# Altium PCB TFR_Soccer_2015.PcbDoc (part 1 of 2)
Units mm, origin at the board's own origin, x right, y up, seen from the top; angles counter-clockwise.
Board outline 210.01 x 194.46 mm, 2 copper layers (Top Layer, Bottom Layer); 53 components, 91 nets, 338 pads, 161 vias.
Unrouted connection lines stored in the file: 2.
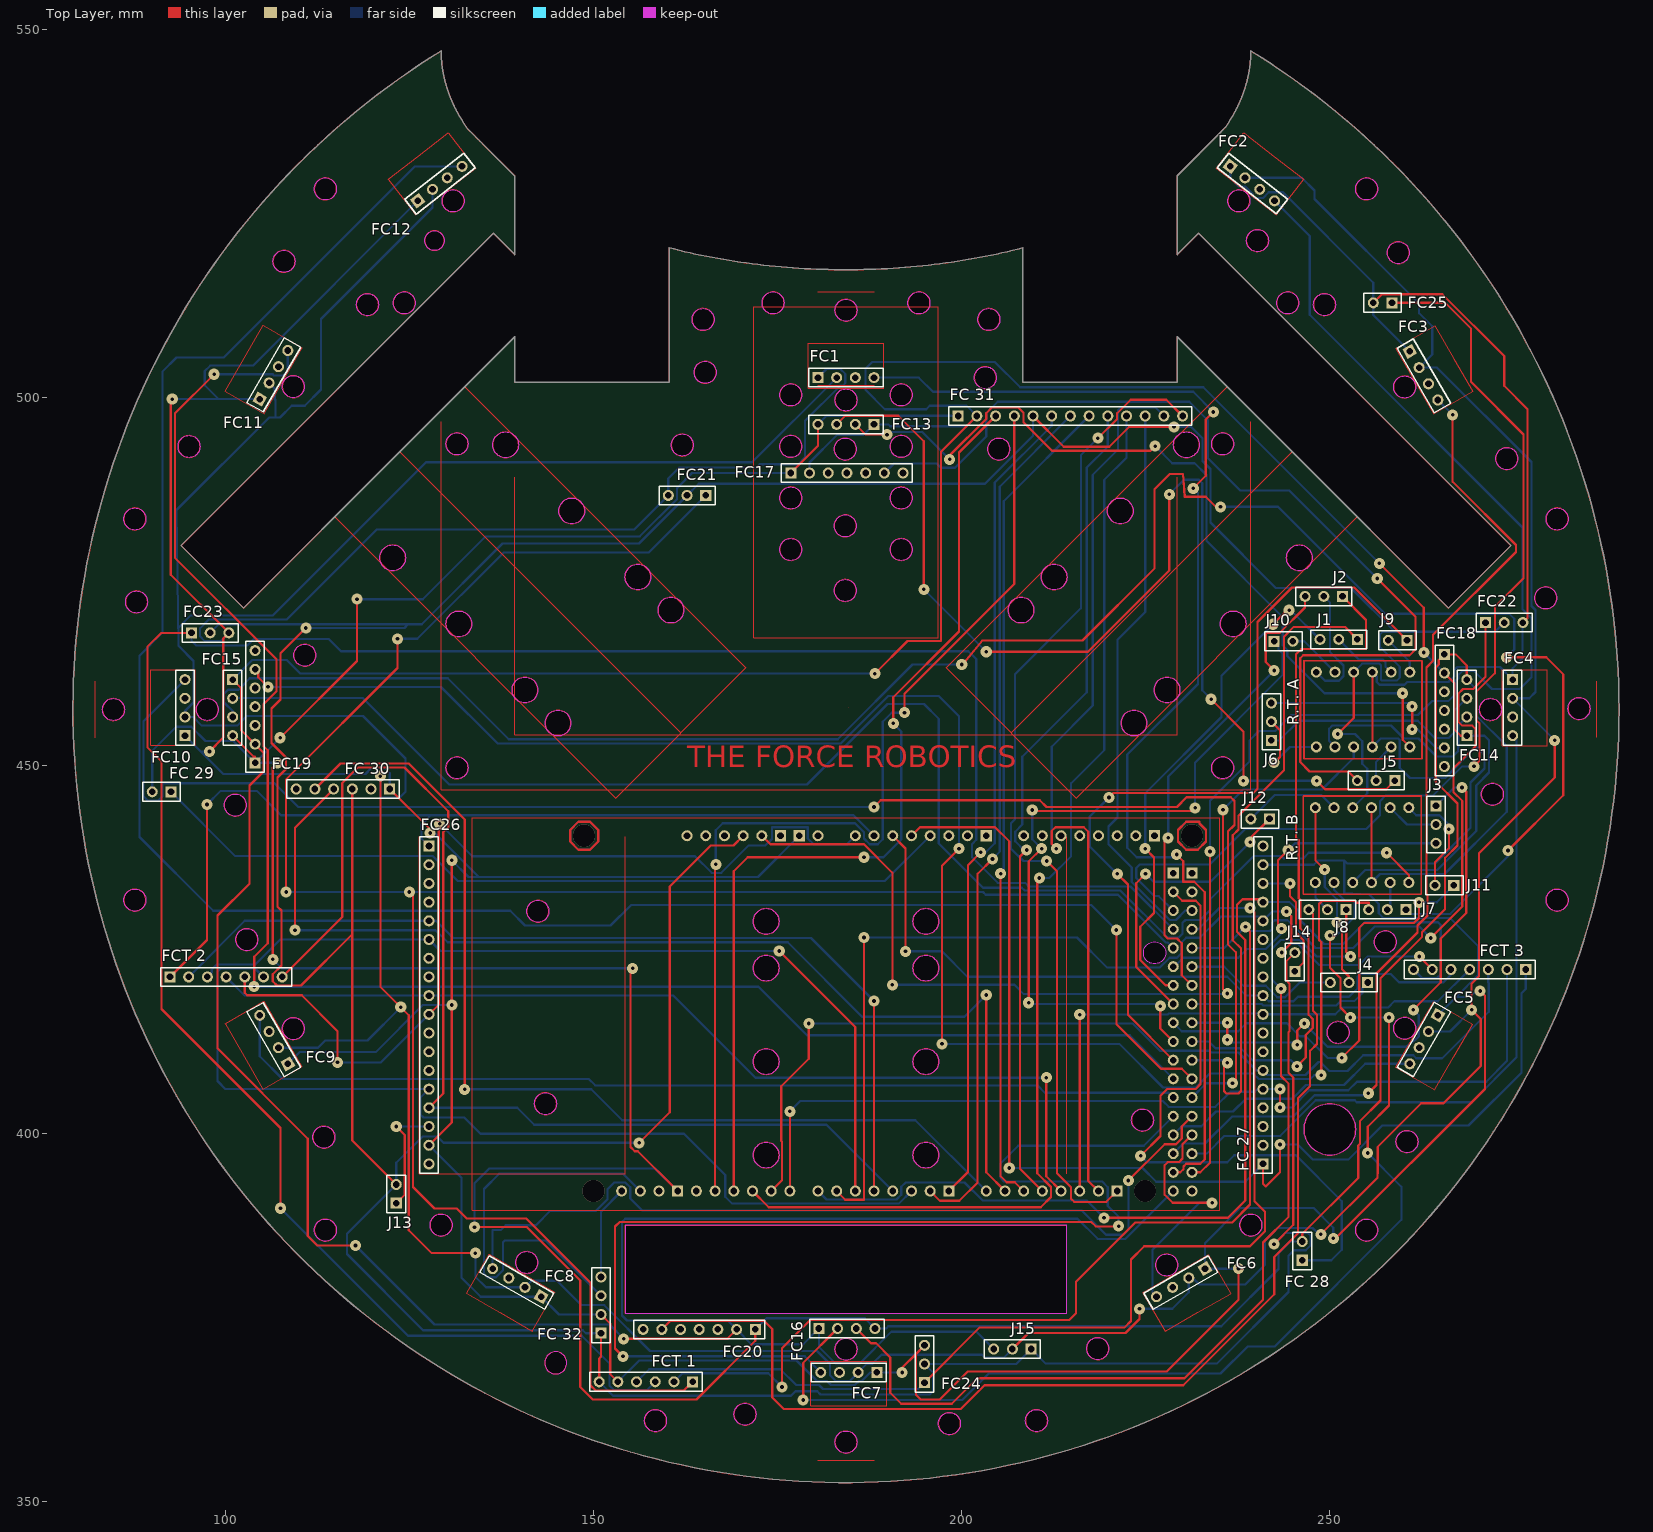
[diagram p0: Top Layer view]
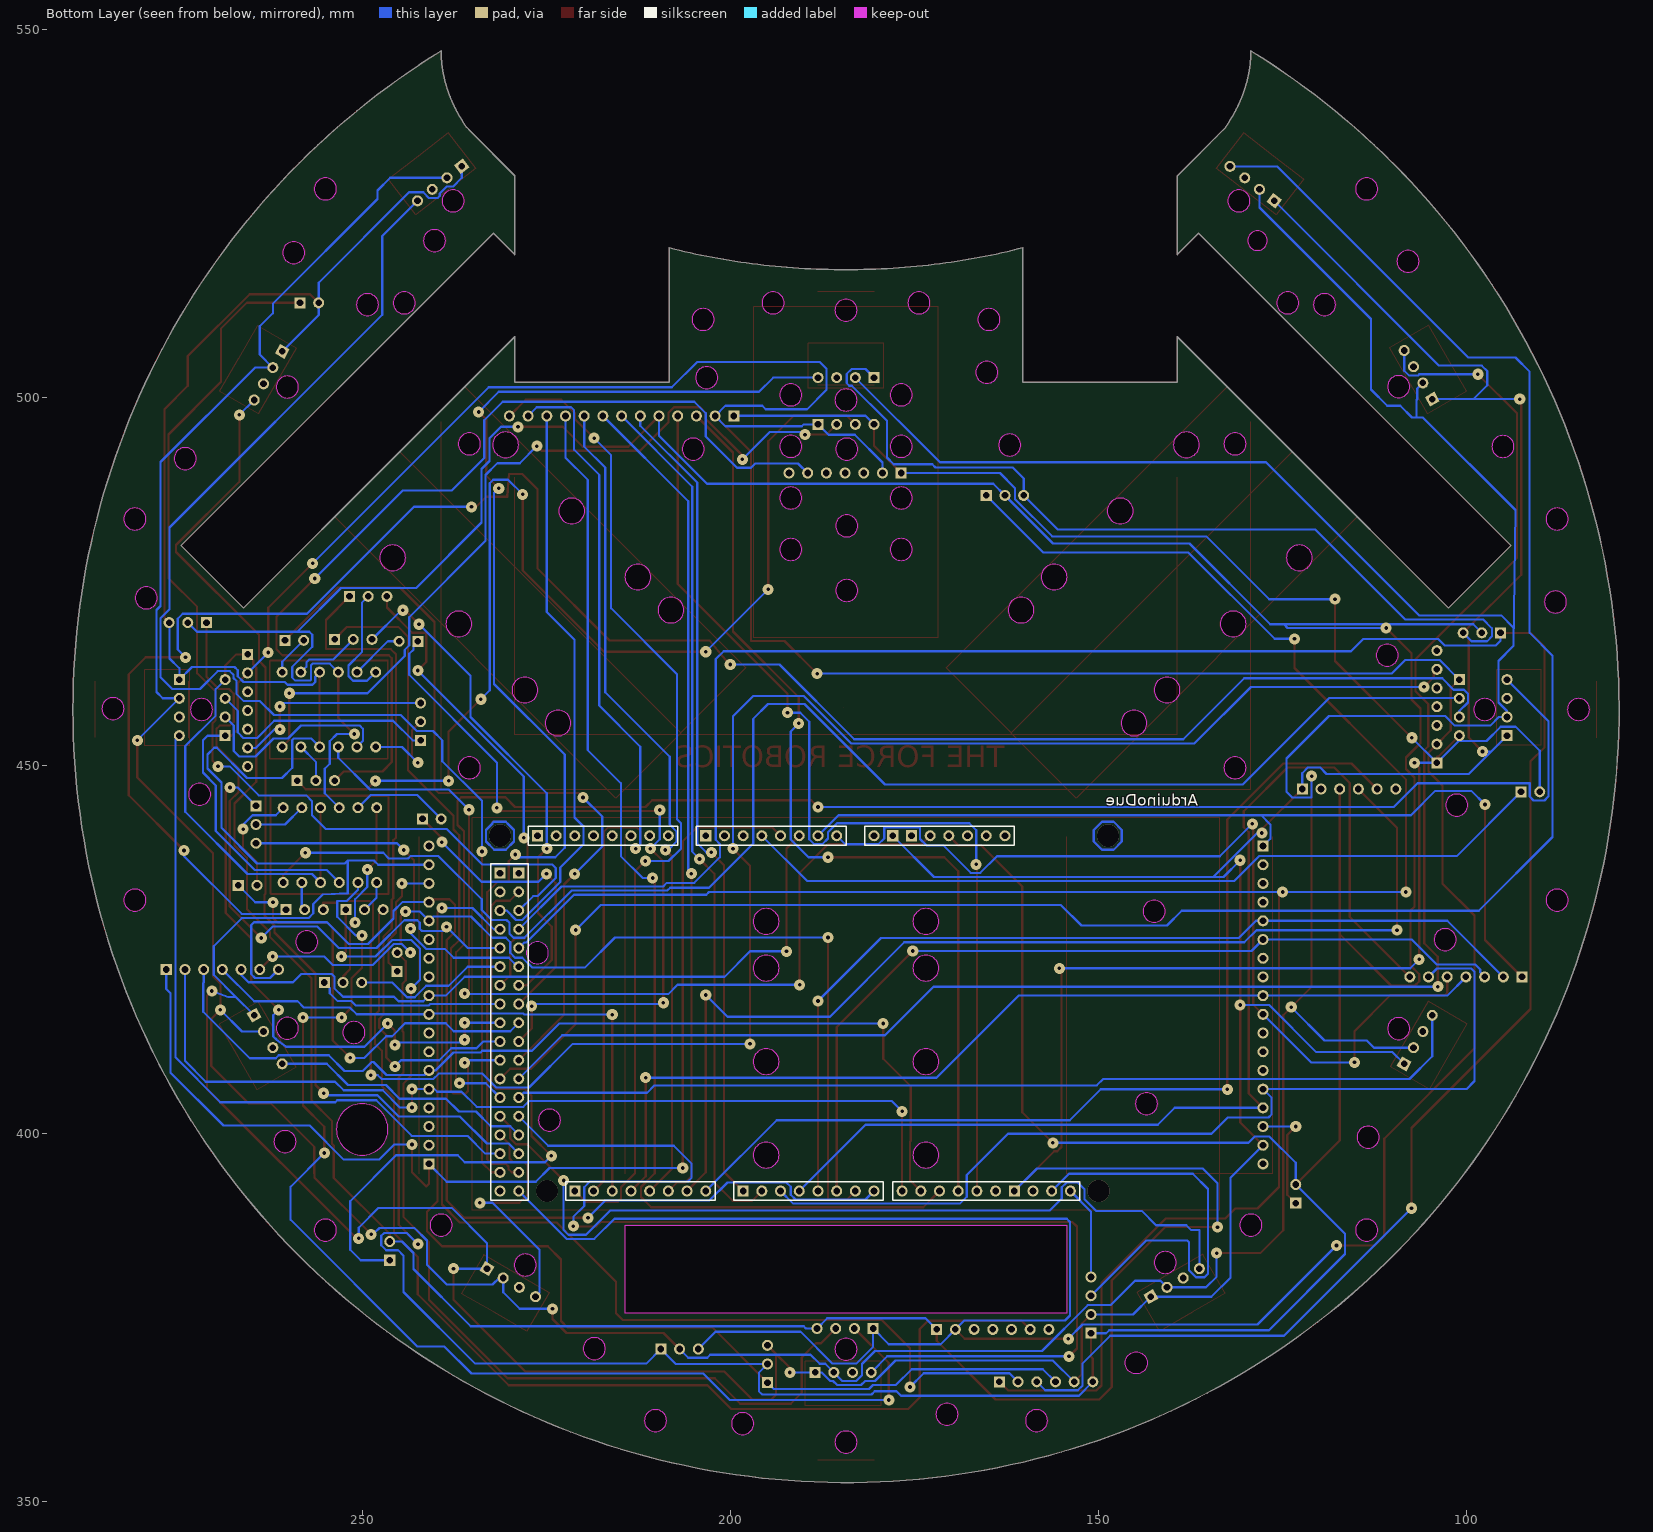
[diagram p1: Bottom Layer view, seen from below]

## Layer stack, top to bottom
Top Solder: solder mask 0.0102, Solder Resist, Dk 3.5
Top Layer: signal copper 0.0356
Dielectric 1: dielectric 0.32, FR-4, Dk 4.8
Bottom Layer: signal copper 0.0356
Bottom Solder: solder mask 0.0102, Solder Resist, Dk 3.5

## Board outline
931 vertices, not listed, extent 79.271,352.577 289.284,547.038
cut-out: 154.277,375.556 214.277,375.556 214.277,387.556 154.277,387.556
cut-out: 283.845,456.208 cw(c283.845,457.708) 282.345,457.708 cw(c283.845,457.708) 283.845,459.208 cw(c283.845,457.708) 285.345,457.708 cw(c283.845,457.708)
cut-out: 143.459,402.54 cw(c143.459,404.04) 141.959,404.04 cw(c143.459,404.04) 143.459,405.54 cw(c143.459,404.04) 144.959,404.04 cw(c143.459,404.04)
cut-out: 142.419,428.68 cw(c142.419,430.18) 140.919,430.18 cw(c142.419,430.18) 142.419,431.68 cw(c142.419,430.18) 143.919,430.18 cw(c142.419,430.18)
cut-out: 131.434,448.164 cw(c131.434,449.664) 129.934,449.664 cw(c131.434,449.664) 131.434,451.164 cw(c131.434,449.664) 132.934,449.664 cw(c131.434,449.664)
cut-out: 145.151,453.991 cw(c145.151,455.741) 143.401,455.741 cw(c145.151,455.741) 145.151,457.491 cw(c145.151,455.741) 146.901,455.741 cw(c145.151,455.741)
cut-out: 140.661,458.481 cw(c140.661,460.231) 138.911,460.231 cw(c140.661,460.231) 140.661,461.981 cw(c140.661,460.231) 142.411,460.231 cw(c140.661,460.231)
cut-out: 122.701,476.441 cw(c122.701,478.191) 120.951,478.191 cw(c122.701,478.191) 122.701,479.941 cw(c122.701,478.191) 124.451,478.191 cw(c122.701,478.191)
cut-out: 131.681,467.461 cw(c131.681,469.211) 129.931,469.211 cw(c131.681,469.211) 131.681,470.961 cw(c131.681,469.211) 133.431,469.211 cw(c131.681,469.211)
cut-out: 147.025,482.805 cw(c147.025,484.555) 145.275,484.555 cw(c147.025,484.555) 147.025,486.305 cw(c147.025,484.555) 148.775,484.555 cw(c147.025,484.555)
cut-out: 156.005,473.825 cw(c156.005,475.575) 154.255,475.575 cw(c156.005,475.575) 156.005,477.325 cw(c156.005,475.575) 157.755,475.575 cw(c156.005,475.575)
cut-out: 156.005,473.825 cw(c156.005,475.575) 154.255,475.575 cw(c156.005,475.575) 156.005,477.325 cw(c156.005,475.575) 157.755,475.575 cw(c156.005,475.575)
cut-out: 160.495,469.335 cw(c160.495,471.085) 158.745,471.085 cw(c160.495,471.085) 160.495,472.835 cw(c160.495,471.085) 162.245,471.085 cw(c160.495,471.085)
cut-out: 131.434,492.164 cw(c131.434,493.664) 129.934,493.664 cw(c131.434,493.664) 131.434,495.164 cw(c131.434,493.664) 132.934,493.664 cw(c131.434,493.664)
cut-out: 138.045,491.786 cw(c138.045,493.536) 136.295,493.536 cw(c138.045,493.536) 138.045,495.286 cw(c138.045,493.536) 139.795,493.536 cw(c138.045,493.536)
cut-out: 162.043,492.008 cw(c162.043,493.508) 160.543,493.508 cw(c162.043,493.508) 162.043,495.008 cw(c162.043,493.508) 163.543,493.508 cw(c162.043,493.508)
cut-out: 165.152,501.886 cw(c165.152,503.386) 163.652,503.386 cw(c165.152,503.386) 165.152,504.886 cw(c165.152,503.386) 166.652,503.386 cw(c165.152,503.386)
cut-out: 164.868,509.065 cw(c164.868,510.565) 163.368,510.565 cw(c164.868,510.565) 164.868,512.065 cw(c164.868,510.565) 166.368,510.565 cw(c164.868,510.565)
cut-out: 194.186,511.318 cw(c194.186,512.818) 192.686,512.818 cw(c194.186,512.818) 194.186,514.318 cw(c194.186,512.818) 195.686,512.818 cw(c194.186,512.818)
cut-out: 184.277,510.318 cw(c184.277,511.818) 182.777,511.818 cw(c184.277,511.818) 184.277,513.318 cw(c184.277,511.818) 185.777,511.818 cw(c184.277,511.818)
cut-out: 174.368,511.318 cw(c174.368,512.818) 172.868,512.818 cw(c174.368,512.818) 174.368,514.318 cw(c174.368,512.818) 175.868,512.818 cw(c174.368,512.818)
cut-out: 176.777,498.818 cw(c176.777,500.318) 175.277,500.318 cw(c176.777,500.318) 176.777,501.818 cw(c176.777,500.318) 178.277,500.318 cw(c176.777,500.318)
cut-out: 184.277,498.118 cw(c184.277,499.618) 182.777,499.618 cw(c184.277,499.618) 184.277,501.118 cw(c184.277,499.618) 185.777,499.618 cw(c184.277,499.618)
cut-out: 184.177,491.459 cw(c184.177,492.959) 182.677,492.959 cw(c184.177,492.959) 184.177,494.459 cw(c184.177,492.959) 185.677,492.959 cw(c184.177,492.959)
cut-out: 176.777,491.818 cw(c176.777,493.318) 175.277,493.318 cw(c176.777,493.318) 176.777,494.818 cw(c176.777,493.318) 178.277,493.318 cw(c176.777,493.318)
cut-out: 176.777,484.818 cw(c176.777,486.318) 175.277,486.318 cw(c176.777,486.318) 176.777,487.818 cw(c176.777,486.318) 178.277,486.318 cw(c176.777,486.318)
cut-out: 184.177,481.032 cw(c184.177,482.532) 182.677,482.532 cw(c184.177,482.532) 184.177,484.032 cw(c184.177,482.532) 185.677,482.532 cw(c184.177,482.532)
cut-out: 176.777,477.818 cw(c176.777,479.318) 175.277,479.318 cw(c176.777,479.318) 176.777,480.818 cw(c176.777,479.318) 178.277,479.318 cw(c176.777,479.318)
cut-out: 184.177,472.251 cw(c184.177,473.751) 182.677,473.751 cw(c184.177,473.751) 184.177,475.251 cw(c184.177,473.751) 185.677,473.751 cw(c184.177,473.751)
cut-out: 191.777,477.818 cw(c191.777,479.318) 190.277,479.318 cw(c191.777,479.318) 191.777,480.818 cw(c191.777,479.318) 193.277,479.318 cw(c191.777,479.318)
cut-out: 191.777,484.818 cw(c191.777,486.318) 190.277,486.318 cw(c191.777,486.318) 191.777,487.818 cw(c191.777,486.318) 193.277,486.318 cw(c191.777,486.318)
cut-out: 191.777,491.818 cw(c191.777,493.318) 190.277,493.318 cw(c191.777,493.318) 191.777,494.818 cw(c191.777,493.318) 193.277,493.318 cw(c191.777,493.318)
cut-out: 191.777,498.818 cw(c191.777,500.318) 190.277,500.318 cw(c191.777,500.318) 191.777,501.818 cw(c191.777,500.318) 193.277,500.318 cw(c191.777,500.318)
cut-out: 203.686,509.065 cw(c203.686,510.565) 202.186,510.565 cw(c203.686,510.565) 203.686,512.065 cw(c203.686,510.565) 205.186,510.565 cw(c203.686,510.565)
cut-out: 203.202,501.154 cw(c203.202,502.654) 201.702,502.654 cw(c203.202,502.654) 203.202,504.154 cw(c203.202,502.654) 204.702,502.654 cw(c203.202,502.654)
cut-out: 205.031,491.459 cw(c205.031,492.959) 203.531,492.959 cw(c205.031,492.959) 205.031,494.459 cw(c205.031,492.959) 206.531,492.959 cw(c205.031,492.959)
cut-out: 237.642,525.171 cw(c237.642,526.671) 236.142,526.671 cw(c237.642,526.671) 237.642,528.171 cw(c237.642,526.671) 239.142,526.671 cw(c237.642,526.671)
cut-out: 240.171,519.78 cw(c240.171,521.28) 238.671,521.28 cw(c240.171,521.28) 240.171,522.78 cw(c240.171,521.28) 241.671,521.28 cw(c240.171,521.28)
cut-out: 254.988,526.792 cw(c254.988,528.292) 253.488,528.292 cw(c254.988,528.292) 254.988,529.792 cw(c254.988,528.292) 256.488,528.292 cw(c254.988,528.292)
cut-out: 259.292,518.13 cw(c259.292,519.63) 257.792,519.63 cw(c259.292,519.63) 259.292,521.13 cw(c259.292,519.63) 260.792,519.63 cw(c259.292,519.63)
cut-out: 249.277,511.081 cw(c249.277,512.581) 247.777,512.581 cw(c249.277,512.581) 249.277,514.081 cw(c249.277,512.581) 250.777,512.581 cw(c249.277,512.581)
cut-out: 244.277,511.318 cw(c244.277,512.818) 242.777,512.818 cw(c244.277,512.818) 244.277,514.318 cw(c244.277,512.818) 245.777,512.818 cw(c244.277,512.818)
cut-out: 260.16,499.892 cw(c260.16,501.392) 258.66,501.392 cw(c260.16,501.392) 260.16,502.892 cw(c260.16,501.392) 261.66,501.392 cw(c260.16,501.392)
cut-out: 274.033,490.161 cw(c274.033,491.661) 272.533,491.661 cw(c274.033,491.661) 274.033,493.161 cw(c274.033,491.661) 275.533,491.661 cw(c274.033,491.661)
cut-out: 280.87,481.963 cw(c280.87,483.463) 279.37,483.463 cw(c280.87,483.463) 280.87,484.963 cw(c280.87,483.463) 282.37,483.463 cw(c280.87,483.463)
cut-out: 271.822,456.081 cw(c271.822,457.581) 270.322,457.581 cw(c271.822,457.581) 271.822,459.081 cw(c271.822,457.581) 273.322,457.581 cw(c271.822,457.581)
cut-out: 279.32,471.245 cw(c279.32,472.745) 277.82,472.745 cw(c279.32,472.745) 279.32,474.245 cw(c279.32,472.745) 280.82,472.745 cw(c279.32,472.745)
cut-out: 236.873,467.461 cw(c236.873,469.211) 235.123,469.211 cw(c236.873,469.211) 236.873,470.961 cw(c236.873,469.211) 238.623,469.211 cw(c236.873,469.211)
cut-out: 245.853,476.441 cw(c245.853,478.191) 244.103,478.191 cw(c245.853,478.191) 245.853,479.941 cw(c245.853,478.191) 247.603,478.191 cw(c245.853,478.191)
cut-out: 235.434,492.164 cw(c235.434,493.664) 233.934,493.664 cw(c235.434,493.664) 235.434,495.164 cw(c235.434,493.664) 236.934,493.664 cw(c235.434,493.664)
cut-out: 230.509,491.786 cw(c230.509,493.536) 228.759,493.536 cw(c230.509,493.536) 230.509,495.286 cw(c230.509,493.536) 232.259,493.536 cw(c230.509,493.536)
cut-out: 221.529,482.805 cw(c221.529,484.555) 219.779,484.555 cw(c221.529,484.555) 221.529,486.305 cw(c221.529,484.555) 223.279,484.555 cw(c221.529,484.555)
cut-out: 212.549,473.825 cw(c212.549,475.575) 210.799,475.575 cw(c212.549,475.575) 212.549,477.325 cw(c212.549,475.575) 214.299,475.575 cw(c212.549,475.575)
cut-out: 208.059,469.335 cw(c208.059,471.085) 206.309,471.085 cw(c208.059,471.085) 208.059,472.835 cw(c208.059,471.085) 209.809,471.085 cw(c208.059,471.085)
cut-out: 223.403,453.991 cw(c223.403,455.741) 221.653,455.741 cw(c223.403,455.741) 223.403,457.491 cw(c223.403,455.741) 225.153,455.741 cw(c223.403,455.741)
cut-out: 227.893,458.481 cw(c227.893,460.231) 226.143,460.231 cw(c227.893,460.231) 227.893,461.981 cw(c227.893,460.231) 229.643,460.231 cw(c227.893,460.231)
cut-out: 235.434,448.164 cw(c235.434,449.664) 233.934,449.664 cw(c235.434,449.664) 235.434,451.164 cw(c235.434,449.664) 236.934,449.664 cw(c235.434,449.664)
cut-out: 272.083,444.573 cw(c272.083,446.073) 270.583,446.073 cw(c272.083,446.073) 272.083,447.573 cw(c272.083,446.073) 273.583,446.073 cw(c272.083,446.073)
cut-out: 280.87,430.199 cw(c280.87,431.699) 279.37,431.699 cw(c280.87,431.699) 280.87,433.199 cw(c280.87,431.699) 282.37,431.699 cw(c280.87,431.699)
cut-out: 257.528,424.522 cw(c257.528,426.022) 256.028,426.022 cw(c257.528,426.022) 257.528,427.522 cw(c257.528,426.022) 259.028,426.022 cw(c257.528,426.022)
cut-out: 173.427,427.056 cw(c173.427,428.806) 171.677,428.806 cw(c173.427,428.806) 173.427,430.556 cw(c173.427,428.806) 175.177,428.806 cw(c173.427,428.806)
cut-out: 173.427,420.706 cw(c173.427,422.456) 171.677,422.456 cw(c173.427,422.456) 173.427,424.206 cw(c173.427,422.456) 175.177,422.456 cw(c173.427,422.456)
cut-out: 173.427,408.006 cw(c173.427,409.756) 171.677,409.756 cw(c173.427,409.756) 173.427,411.506 cw(c173.427,409.756) 175.177,409.756 cw(c173.427,409.756)
cut-out: 173.427,395.306 cw(c173.427,397.056) 171.677,397.056 cw(c173.427,397.056) 173.427,398.806 cw(c173.427,397.056) 175.177,397.056 cw(c173.427,397.056)
cut-out: 195.127,395.306 cw(c195.127,397.056) 193.377,397.056 cw(c195.127,397.056) 195.127,398.806 cw(c195.127,397.056) 196.877,397.056 cw(c195.127,397.056)
cut-out: 195.127,408.006 cw(c195.127,409.756) 193.377,409.756 cw(c195.127,409.756) 195.127,411.506 cw(c195.127,409.756) 196.877,409.756 cw(c195.127,409.756)
cut-out: 195.127,420.706 cw(c195.127,422.456) 193.377,422.456 cw(c195.127,422.456) 195.127,424.206 cw(c195.127,422.456) 196.877,422.456 cw(c195.127,422.456)
cut-out: 195.127,427.056 cw(c195.127,428.806) 193.377,428.806 cw(c195.127,428.806) 195.127,430.556 cw(c195.127,428.806) 196.877,428.806 cw(c195.127,428.806)
cut-out: 226.189,423.036 cw(c226.189,424.536) 224.689,424.536 cw(c226.189,424.536) 226.189,426.036 cw(c226.189,424.536) 227.689,424.536 cw(c226.189,424.536)
cut-out: 224.555,400.312 cw(c224.555,401.812) 223.055,401.812 cw(c224.555,401.812) 224.555,403.312 cw(c224.555,401.812) 226.055,401.812 cw(c224.555,401.812)
cut-out: 260.159,412.786 cw(c260.159,414.286) 258.659,414.286 cw(c260.159,414.286) 260.159,415.786 cw(c260.159,414.286) 261.659,414.286 cw(c260.159,414.286)
cut-out: 251.118,412.216 cw(c251.118,413.716) 249.618,413.716 cw(c251.118,413.716) 251.118,415.216 cw(c251.118,413.716) 252.618,413.716 cw(c251.118,413.716)
cut-out: 249.996,397.056 cw(c249.996,400.556) 246.496,400.556 cw(c249.996,400.556) 249.996,404.056 cw(c249.996,400.556) 253.496,400.556 cw(c249.996,400.556)
cut-out: 260.48,397.393 cw(c260.48,398.893) 258.98,398.893 cw(c260.48,398.893) 260.48,400.393 cw(c260.48,398.893) 261.98,398.893 cw(c260.48,398.893)
cut-out: 254.988,385.37 cw(c254.988,386.87) 253.488,386.87 cw(c254.988,386.87) 254.988,388.37 cw(c254.988,386.87) 256.488,386.87 cw(c254.988,386.87)
cut-out: 239.277,386.056 cw(c239.277,387.556) 237.777,387.556 cw(c239.277,387.556) 239.277,389.056 cw(c239.277,387.556) 240.777,387.556 cw(c239.277,387.556)
cut-out: 227.84,380.628 cw(c227.84,382.128) 226.34,382.128 cw(c227.84,382.128) 227.84,383.628 cw(c227.84,382.128) 229.34,382.128 cw(c227.84,382.128)
cut-out: 218.465,369.27 cw(c218.465,370.77) 216.965,370.77 cw(c218.465,370.77) 218.465,372.27 cw(c218.465,370.77) 219.965,370.77 cw(c218.465,370.77)
cut-out: 210.159,359.488 cw(c210.159,360.988) 208.659,360.988 cw(c210.159,360.988) 210.159,362.488 cw(c210.159,360.988) 211.659,360.988 cw(c210.159,360.988)
cut-out: 198.326,359.089 cw(c198.326,360.589) 196.826,360.589 cw(c198.326,360.589) 198.326,362.089 cw(c198.326,360.589) 199.826,360.589 cw(c198.326,360.589)
cut-out: 184.277,356.581 cw(c184.277,358.081) 182.777,358.081 cw(c184.277,358.081) 184.277,359.581 cw(c184.277,358.081) 185.777,358.081 cw(c184.277,358.081)
cut-out: 184.277,369.187 cw(c184.277,370.687) 182.777,370.687 cw(c184.277,370.687) 184.277,372.187 cw(c184.277,370.687) 185.777,370.687 cw(c184.277,370.687)
cut-out: 170.558,360.358 cw(c170.558,361.858) 169.058,361.858 cw(c170.558,361.858) 170.558,363.358 cw(c170.558,361.858) 172.058,361.858 cw(c170.558,361.858)
cut-out: 158.395,359.488 cw(c158.395,360.988) 156.895,360.988 cw(c158.395,360.988) 158.395,362.488 cw(c158.395,360.988) 159.895,360.988 cw(c158.395,360.988)
cut-out: 144.853,367.34 ccw(c144.853,368.84) 146.353,368.84 ccw(c144.853,368.84) 144.853,370.34 ccw(c144.853,368.84) 143.353,368.84 ccw(c144.853,368.84)
cut-out: 144.853,367.34 ccw(c144.853,368.84) 146.353,368.84 ccw(c144.853,368.84) 144.853,370.34 ccw(c144.853,368.84) 143.353,368.84 ccw(c144.853,368.84)
cut-out: 140.911,380.969 cw(c140.911,382.469) 139.411,382.469 cw(c140.911,382.469) 140.911,383.969 cw(c140.911,382.469) 142.411,382.469 cw(c140.911,382.469)
cut-out: 129.277,386.056 cw(c129.277,387.556) 127.777,387.556 cw(c129.277,387.556) 129.277,389.056 cw(c129.277,387.556) 130.777,387.556 cw(c129.277,387.556)
cut-out: 113.566,385.37 cw(c113.566,386.87) 112.066,386.87 cw(c113.566,386.87) 113.566,388.37 cw(c113.566,386.87) 115.066,386.87 cw(c113.566,386.87)
cut-out: 113.351,397.991 cw(c113.351,399.491) 111.851,399.491 cw(c113.351,399.491) 113.351,400.991 cw(c113.351,399.491) 114.851,399.491 cw(c113.351,399.491)
cut-out: 109.207,412.74 cw(c109.207,414.24) 107.707,414.24 cw(c109.207,414.24) 109.207,415.74 cw(c109.207,414.24) 110.707,414.24 cw(c109.207,414.24)
cut-out: 102.891,424.827 cw(c102.891,426.327) 101.391,426.327 cw(c102.891,426.327) 102.891,427.827 cw(c102.891,426.327) 104.391,426.327 cw(c102.891,426.327)
cut-out: 87.684,430.199 cw(c87.684,431.699) 86.184,431.699 cw(c87.684,431.699) 87.684,433.199 cw(c87.684,431.699) 89.184,431.699 cw(c87.684,431.699)
cut-out: 101.322,443.097 cw(c101.322,444.597) 99.822,444.597 cw(c101.322,444.597) 101.322,446.097 cw(c101.322,444.597) 102.822,444.597 cw(c101.322,444.597)
cut-out: 97.518,456.081 cw(c97.518,457.581) 96.018,457.581 cw(c97.518,457.581) 97.518,459.081 cw(c97.518,457.581) 99.018,457.581 cw(c97.518,457.581)
cut-out: 84.777,456.081 cw(c84.777,457.581) 83.277,457.581 cw(c84.777,457.581) 84.777,459.081 cw(c84.777,457.581) 86.277,457.581 cw(c84.777,457.581)
cut-out: 110.764,463.456 cw(c110.764,464.956) 109.264,464.956 cw(c110.764,464.956) 110.764,466.456 cw(c110.764,464.956) 112.264,464.956 cw(c110.764,464.956)
cut-out: 87.912,470.69 cw(c87.912,472.19) 86.412,472.19 cw(c87.912,472.19) 87.912,473.69 cw(c87.912,472.19) 89.412,472.19 cw(c87.912,472.19)
cut-out: 87.684,481.963 cw(c87.684,483.463) 86.184,483.463 cw(c87.684,483.463) 87.684,484.963 cw(c87.684,483.463) 89.184,483.463 cw(c87.684,483.463)
cut-out: 95.043,491.807 cw(c95.043,493.307) 93.543,493.307 cw(c95.043,493.307) 95.043,494.807 cw(c95.043,493.307) 96.543,493.307 cw(c95.043,493.307)
cut-out: 109.207,499.938 cw(c109.207,501.438) 107.707,501.438 cw(c109.207,501.438) 109.207,502.938 cw(c109.207,501.438) 110.707,501.438 cw(c109.207,501.438)
cut-out: 128.383,519.941 cw(c128.383,521.28) 127.045,521.28 cw(c128.383,521.28) 128.383,522.618 cw(c128.383,521.28) 129.721,521.28 cw(c128.383,521.28)
cut-out: 130.912,525.171 cw(c130.912,526.671) 129.412,526.671 cw(c130.912,526.671) 130.912,528.171 cw(c130.912,526.671) 132.412,526.671 cw(c130.912,526.671)
cut-out: 124.277,511.318 cw(c124.277,512.818) 122.777,512.818 cw(c124.277,512.818) 124.277,514.318 cw(c124.277,512.818) 125.777,512.818 cw(c124.277,512.818)
cut-out: 119.277,511.081 cw(c119.277,512.581) 117.777,512.581 cw(c119.277,512.581) 119.277,514.081 cw(c119.277,512.581) 120.777,512.581 cw(c119.277,512.581)
cut-out: 107.935,516.961 cw(c107.935,518.461) 106.435,518.461 cw(c107.935,518.461) 107.935,519.961 cw(c107.935,518.461) 109.435,518.461 cw(c107.935,518.461)
cut-out: 113.566,526.792 cw(c113.566,528.292) 112.066,528.292 cw(c113.566,528.292) 113.566,529.792 cw(c113.566,528.292) 115.066,528.292 cw(c113.566,528.292)

## Design rules (kind name [scope] priority, off if disabled: settings)
Clearance Clearance_1 [All] p1: gap=0.254
Clearance [All] p2: gap=0.3
PolygonConnect [All] p1: connectstyle=Relief reliefconductorwidth=0.254 reliefentries=4 polygonreliefangle="90 Angle" airgapwidth=0.254
RoutingVias [All] p1: holewidth=0.5 width=1.5 viastyle="Through Hole" minholewidth=0.711 minwidth=1.27 maxholewidth=0.711 maxwidth=1.27
SolderMaskExpansion [All] p1: expansion=0.102
Width [All] p1: maxlimit=0.3 minlimit=0.3 preferedwidth=0.3
29 further rules are at their usual default settings.

## Components (designator, comment, footprint, x,y, rotation, side; value= is the part's Value field where it differs from the comment)
ArduinoDue "Component_1" Arduino 180.467,418.846 r0 bottom
FC1 "Flat Cable 1" HDR1X4 180.467,502.666 r0 top
FC2 "Flat Cable 2" HDR1X4 236.474,531.368 r322 top
FC3 "Flat Cable 3" HDR1X4 260.858,506.222 r300 top
FC4 "Flat Cable 4" HDR1X4 274.828,461.645 r270 top
FC5 "Flat Cable 5" HDR1X4 264.668,416.052 r240 top
FC6 "Flat Cable 6" HDR1X4 233.045,381.635 r210 top
FC7 "Flat Cable 7" HDR1X4 188.468,367.538 r180 top
FC8 "Flat Cable 8" HDR1X4 142.875,377.825 r150 top
FC9 "Flat Cable 9" HDR1X4 108.458,409.448 r120 top
FC10 "Flat Cable 10" HDR1X4 94.488,454.025 r90 top
FC11 "Flat Cable 11" HDR1X4 104.648,499.745 r60 top
FC12 "Flat Cable 12" HDR1X4 126.111,526.669 r38 top
FC13 "Flat Cable 13" HDR1X4 188.087,496.316 r180 top
FC14 "Flat Cable 14" HDR1X4 268.605,454.025 r90 top
FC15 "Flat Cable 15" HDR1X4 100.965,461.645 r270 top
FC16 "Flat Cable 16" HDR1X4 180.594,373.507 r0 top
FC17 "Flat Cable 17" HDR1X7 176.784,489.712 r0 top
FC18 "Flat Cable 18" HDR1X7 265.557,465.074 r270 top
FC19 "Flat Cable 19" HDR1X7 104.013,450.342 r90 top
FC20 "Flat Cable 20" HDR1X7 171.958,373.38 r180 top
FC21 "Flat Cable 21" HDR1X3 165.227,486.664 r180 top
FC22 "Flat Cable 22" HDR1X3 271.145,469.392 r0 top
FC23 "Flat Cable 23" HDR1X3 95.377,467.995 r0 top
FC24 "Flat Cable 24" HDR1X3 194.945,366.141 r90 top
FC25 "Flat Cable 25" HDR1X2 258.445,512.826 r180 top
FC26 "Flat Cable 26" HDR1X18 127.635,439.039 r270 top
"FC 27" "Flat Cable 27" HDR1X18 240.919,395.859 r90 top
"FC 28" "Flat Cable 28" HDR1X2 246.253,382.778 r90 top
"FC 29" "Flat Cable 29" HDR1X2 92.583,446.405 r180 top
"FC 30" "Flat Cable 30" HDR1X6 122.301,446.786 r180 top
"FC 31" "Flat Cable 31" HDR1X13 199.517,497.459 r0 top
"FC 32" "Flat Cable 32" HDR1X4 151.003,372.872 r90 top
"FCT 1" "Flat Cable Transf. 1" HDR1X6 163.449,366.268 r180 top
"FCT 2" "Flat Cable Transf. 2" HDR1X7 92.456,421.259 r0 top
"FCT 3" "Flat Cable Transf. 3" HDR1X7 276.606,422.275 r180 top
J1 "Jumper 1" HDR1X3 253.746,467.106 r180 top
J2 "Jumper 2" HDR1X3 251.714,472.948 r180 top
J3 "Jumper 3" HDR1X3 264.414,444.5 r270 top
J4 "Jumper 4" HDR1X3 255.143,420.497 r180 top
J5 "Jumper 5" HDR1X3 258.826,447.929 r180 top
J6 "Jumper 6" HDR1X3 242.062,453.39 r90 top
J7 "Jumper 7" HDR1X3 260.35,430.403 r180 top
J8 "Jumper 8" HDR1X3 252.222,430.403 r180 top
J9 "Jumper 9" HDR1X2 260.477,466.979 r180 top
J10 "Jumper 10" HDR1X2 242.443,466.852 r0 top
J11 "Jumper 11" HDR1X2 266.827,433.705 r180 top
J12 "Jumper 12" HDR1X2 241.808,442.722 r180 top
J13 "Jumper 13" HDR1X2 123.19,390.525 r90 top
J14 "Jumper 14" HDR1X2 245.237,422.021 r90 top
J15 "Jumper 15" HDR1X3 209.423,370.713 r180 top
"R.T. A" "Regulador de Tensão A" PCBComponent_1 257.048,454.406 r180 top (schematic designator "Regulador de Tensão A")
"R.T. B" "Regulador de Tensão B" PCBComponent_1 256.921,435.991 r180 top (schematic designator "Regulador de Tensão B")

## Footprints (in the part's own frame and the unit in brackets; to place one, negate y for a bottom-side part, rotate by r counter-clockwise, add the part's x,y. Pads: shape width x height; smd on the part's side, far side on the other; paste and mask are expansions set on the pad)
Arduino [mm] "Arduino Mega 2560"
  rect 1.5x1.5 hole 0.9: 0(17.78,26.67) 21(40.64,26.67) 57(-5.08,-21.59) 58(-2.54,-21.59) 67(22.86,-21.59) 75(45.72,-21.59) 76(-19.05,26.67) 78(48.26,-16.51) 79(50.8,-16.51)
  round 1.5 hole 0.9: 1(15.24,26.67) 2(12.7,26.67) 3(10.16,26.67) 4(7.62,26.67) 5(5.08,26.67) 6(2.54,26.67) 7(0,26.67) 8(-3.81,26.67) 9(-6.35,26.67) 10(-8.89,26.67) 11(-11.43,26.67) 12(-13.97,26.67) 13(-16.51,26.67) 14(22.86,26.67) 15(25.4,26.67) 16(27.94,26.67) 17(30.48,26.67) 18(33.02,26.67) 19(35.56,26.67) 20(38.1,26.67) 22(48.26,24.13) 23(50.8,24.13) 24(48.26,21.59) 25(50.8,21.59) 26(48.26,19.05) 27(50.8,19.05) 28(48.26,16.51) 29(50.8,16.51) 30(48.26,13.97) 31(50.8,13.97) 32(48.26,11.43) 33(50.8,11.43) 34(48.26,8.89) 35(50.8,8.89) 36(48.26,6.35) 37(50.8,6.35) 38(48.26,3.81) 39(50.8,3.81) 40(48.26,1.27) 41(50.8,1.27) 42(48.26,-1.27) 43(50.8,-1.27) 44(48.26,-3.81) 45(50.8,-3.81) 46(48.26,-6.35) 47(50.8,-6.35) 48(48.26,-8.89) 49(50.8,-8.89) 50(48.26,-11.43) 51(50.8,-11.43) 52(48.26,-13.97) 53(50.8,-13.97) 54(-12.7,-21.59) 55(-10.16,-21.59) 56(-7.62,-21.59) 59(0,-21.59) 60(5.08,-21.59) 61(7.62,-21.59) 62(10.16,-21.59) 63(12.7,-21.59) 64(15.24,-21.59) 65(17.78,-21.59) 66(20.32,-21.59) 68(27.94,-21.59) 69(30.48,-21.59) 70(33.02,-21.59) 71(35.56,-21.59) 72(38.1,-21.59) 73(40.64,-21.59) 74(43.18,-21.59) 77(-21.59,26.67) 80(50.8,26.67) 81(48.26,26.67) 82(-24.13,26.67) 83(-26.67,26.67) 84(-15.24,-21.59) 85(-17.78,-21.59)
  silkscreen extent -27.94,-22.86 52.07,27.94
HDR1X2 [mm] "Connector; Header; 2 Position"
  rect 1.5x1.5 hole 0.9: 1(0,0)
  round 1.5 hole 0.9: 2(2.54,0)
  silkscreen extent -1.27,-1.27 3.81,1.27
HDR1X3 [mm] "Connector; Header; 3 Position"
  rect 1.5x1.5 hole 0.9: 1(0,0)
  round 1.5 hole 0.9: 2(2.54,0) 3(5.08,0)
  silkscreen extent -1.27,-1.27 6.35,1.27
HDR1X4 [mm] "Connector; Header; 4 Position"
  rect 1.5x1.5 hole 0.9: 1(0,0)
  round 1.5 hole 0.9: 2(2.54,0) 3(5.08,0) 4(7.62,0)
  silkscreen extent -1.27,-1.27 8.89,1.27
HDR1X6 [mm] "Connector; Header; 6 Position"
  rect 1.5x1.5 hole 0.9: 1(0,0)
  round 1.5 hole 0.9: 2(2.54,0) 3(5.08,0) 4(7.62,0) 5(10.16,0) 6(12.7,0)
  silkscreen extent -1.27,-1.27 13.97,1.27
HDR1X7 [mm] "Connector; Header; 7 Position"
  rect 1.5x1.5 hole 0.9: 1(0,0)
  round 1.5 hole 0.9: 2(2.54,0) 3(5.08,0) 4(7.62,0) 5(10.16,0) 6(12.7,0) 7(15.24,0)
  silkscreen extent -1.27,-1.27 16.51,1.27
HDR1X13 [mm] "Connector; Header; 13 Position"
  rect 1.5x1.5 hole 0.9: 1(0,0)
  round 1.5 hole 0.9: 2(2.54,0) 3(5.08,0) 4(7.62,0) 5(10.16,0) 6(12.7,0) 7(15.24,0) 8(17.78,0) 9(20.32,0) 10(22.86,0) 11(25.4,0) 12(27.94,0) 13(30.48,0)
  silkscreen extent -1.27,-1.27 31.75,1.27
HDR1X18 [mm] "Connector; Header; 18 Position"
  rect 1.5x1.5 hole 0.9: 1(0,0)
  round 1.5 hole 0.9: 2(2.54,0) 3(5.08,0) 4(7.62,0) 5(10.16,0) 6(12.7,0) 7(15.24,0) 8(17.78,0) 9(20.32,0) 10(22.86,0) 11(25.4,0) 12(27.94,0) 13(30.48,0) 14(33.02,0) 15(35.56,0) 16(38.1,0) 17(40.64,0) 18(43.18,0)
  silkscreen extent -1.27,-1.27 44.45,1.27
PCBComponent_1 [mm]
  round 1.5 hole 0.9: 0(-3.81,1.905) 1(-1.27,1.905) 2(1.27,1.905) 3(3.81,1.905) 4(6.35,1.905) 5(8.89,1.905) 6(-3.81,-8.255) 7(-1.27,-8.255) 8(1.27,-8.255) 9(3.81,-8.255) 10(6.35,-8.255) 11(8.89,-8.255)
  Top Layer lines w0.2: 10.55,3.48 10.55,-9.83 8.495,-9.83 -2.03,-9.83 -5.5,-9.83 -5.5,3.48 10.55,3.48

## Part data
ArduinoDue: "Arduino Due Board"
FC1 FC2 FC3 FC4 FC5 FC6 FC7 FC8 FC9 FC10 FC11 FC12 FC13 FC14 FC15 FC16 "FC 32": library part "Header 4", "Header, 4-Pin"
FC17 FC18 FC19 FC20 "FCT 2" "FCT 3": library part "Header 7", "Header, 7-Pin"
FC21 FC22 FC23 FC24 J1 J2 J3 J4 J5 J6 J7 J8 J15: library part "Header 3", "Header, 3-Pin"
FC25 "FC 28" "FC 29" J9 J10 J11 J12 J13 J14: library part "Header 2", "Header, 2-Pin"
FC26 "FC 27": library part "Header 18", "Header, 18-Pin"
"FC 30" "FCT 1": library part "Header 6", "Header, 6-Pin"
"FC 31": library part "Header 13", "Header, 13-Pin"
"R.T. A" "R.T. B": library part Component_1

## Via types
v1: diameter 1.5, hole 0.5, Top Layer to Bottom Layer, 157 vias
v2: diameter 3, hole 3, Top Layer to Bottom Layer, 4 vias

## Nets (pads, with @x,y where several pads share a name; then routed paths per layer and width w, separated by ;. In a path a pad name is that pad's centre, name@x,y a point inside that pad or via, vN(x,y) a via of type N, cw(c..) or ccw(c..) an arc to the next point about the centre after c; other vN are vias at no path point)
NetArduinoDue_0: "FC 31.6" ArduinoDue.0 | length 111.5
  Top Layer w0.3: ArduinoDue.0@198.247,392.176 200.838,394.767 200.838,436.448 v1(202.565,438.175)
  Bottom Layer w0.3: v1(202.565,438.175) 203.251,438.175 204.495,439.42 204.495,488.417 212.217,496.138 212.217,497.459
NetArduinoDue_1: "FC 31.7" ArduinoDue.1 | length 117.4
  Top Layer w0.3: ArduinoDue.1@195.707,392.176 197.028,390.855 199.669,390.855 202.159,393.344 202.159,435.28 v1(204.165,437.286)
  Bottom Layer w0.3: v1(204.165,437.286) 205.156,438.277 205.156,487.858 214.757,497.459
NetArduinoDue_2: "FCT 2.6" ArduinoDue.2 FC26.14 | length 129
  Bottom Layer w0.3: 105.156,421.259 104.002,422.413 99.363,422.413 98.908,421.957 98.908,407.111 100,406.019 FC26.14@127.635,406.019 126.467,404.851 126.467,402.59 126.898,402.158 132.41,402.158 134.62,399.948 162.281,399.948 167.869,394.36 167.869,391.414 168.815,390.468 191.459,390.468 ArduinoDue.2@193.167,392.176
NetArduinoDue_3: "FCT 2.7" ArduinoDue.3 FC26.15 | length 156.5
  Top Layer w0.3: 107.696,421.259 115.849,429.412 115.849,447.599 117.945,449.694 124.318,449.694 130.238,443.774 130.238,441.583 129.576,440.922 129.576,405.42 FC26.15@127.635,403.479
  Bottom Layer w0.3: FC26.15@127.635,403.479 139.624,403.479 141.915,401.188 181.615,401.188 ArduinoDue.3@190.627,392.176
NetArduinoDue_4: "FCT 2.2" ArduinoDue.4 FC26.5 | length 126.6
  Top Layer w0.3: ArduinoDue.4@188.087,392.176 v1(188.087,417.982)
  Bottom Layer w0.3: 94.996,421.259 102.616,428.879 FC26.5@127.635,428.879 128.575,428.879 130.912,426.542 179.527,426.542 v1(188.087,417.982)
NetArduinoDue_5: "FCT 2.3" ArduinoDue.5 FC26.6 | length 117.6
  Top Layer w0.3: v1(175.209,424.79) 185.547,414.452 ArduinoDue.5@185.547,392.176
  Bottom Layer w0.3: 97.536,421.259 98.135,421.858 98.135,422.275 98.827,422.967 104.072,422.967 107.444,426.339 FC26.6@127.635,426.339 129.184,424.79 v1(175.209,424.79)
NetArduinoDue_6: "FC 27.14" "FCT 3.6" ArduinoDue.6 | length 133
  Top Layer w0.3: ArduinoDue.6@183.007,392.176 184.175,391.008 186.69,391.008 186.715,391.033 v1(186.715,426.618) ; v1(243.459,424.586) 244.754,425.882 244.754,429.507 v1(244.119,430.142) ; v1(262.153,424.028) 263.906,422.275
  Bottom Layer w0.3: v1(186.715,426.618) 215.646,426.618 219.71,422.554 226.924,422.554 228.244,423.875 229.235,423.875 229.895,424.536 229.895,425.958 230.505,426.568 232.308,426.568 235.218,429.478 240.32,429.478 240.919,428.879 242.182,430.142 v1(244.119,430.142) ; v1(243.459,424.586) 244.602,425.729 245.701,425.729 248.556,422.874 253.986,422.874 255.14,424.028 v1(262.153,424.028)
NetArduinoDue_7: "FC 27.15" "FCT 3.7" ArduinoDue.7 | length 147.5
  Top Layer w0.3: v1(219.329,388.544) 219.34,388.555 236.174,388.555 238.506,390.887 238.506,426.277 237.377,427.406 237.377,431.049 238.125,431.797 240.319,431.797 240.319,431.419 240.919,431.419
  Bottom Layer w0.3: ArduinoDue.7@180.467,392.176 181.621,391.022 191.135,391.022 191.795,391.682 191.795,392.748 192.392,393.344 200.381,393.344 202.844,390.881 216.992,390.881 v1(219.329,388.544) ; 240.919,431.419 244.535,431.419 245.742,430.212 245.742,429.198 249.196,425.744 251.817,425.744 254.768,428.695 264.7,428.695 265.074,428.32 265.074,421.64 264.555,421.121 262.52,421.121 261.366,422.275
NetArduinoDue_8: "FC 27.5" "FCT 3.2" ArduinoDue.8 | length 127.7
  Top Layer w0.3: ArduinoDue.8@176.657,392.176 v1(176.657,402.996) ; v1(243.23,403.53) v1(243.23,406.019)
  Bottom Layer w0.3: v1(176.657,402.996) 178.079,404.419 227.305,404.419 228.117,403.606 234.442,403.606 236.499,405.663 239.801,405.663 240.157,406.019 240.919,406.019 v1(243.23,406.019) ; v1(243.23,403.53) 244.881,403.53 247.209,405.858 252.518,405.858 253.695,407.035 271.247,407.035 274.066,409.854 274.066,422.275
NetArduinoDue_9: "FC 27.6" "FCT 3.3" ArduinoDue.9 | length 130.9
  Top Layer w0.3: ArduinoDue.9@174.117,392.176 175.59,393.649 175.59,398.882 175.489,398.983 175.489,406.425 179.222,410.159 v1(179.222,414.934)
  Bottom Layer w0.3: v1(179.222,414.934) 223.215,414.934 226.924,411.226 233.682,411.226 233.902,411.006 237.596,411.006 240.043,408.559 240.919,408.559 241.528,407.95 246.692,407.95 248.455,409.713 248.676,409.713 249.914,408.475 252.402,408.475 254.543,410.616 261.327,410.616 261.733,410.21 265.25,410.21 271.573,416.533 271.573,420.451 271.526,420.498 271.526,422.275
NetArduinoDue_10: "FC 31.10" ArduinoDue.10 | length 154.7
  Top Layer w0.3: ArduinoDue.10@171.577,392.176 173.787,389.966 210.718,389.966 212.115,391.363 212.115,392.733 210.261,394.587 210.261,434.416 v1(210.541,434.696)
  Bottom Layer w0.3: v1(210.541,434.696) 211.896,434.696 214.859,437.658 214.859,447.573 219.354,452.069 219.354,488.772 222.377,491.795 222.377,497.459
NetArduinoDue_11: "FC 31.3" ArduinoDue.11 | length 131.7
  Top Layer w0.3: ArduinoDue.11@169.037,392.176 169.037,435.61 170.942,437.515 v1(186.715,437.515) ; v1(190.703,455.701) 190.703,459.254 199.639,468.191 199.639,492.501 204.597,497.459
  Bottom Layer w0.3: v1(186.715,437.515) 189.382,437.515 191.795,439.928 191.795,454.609 v1(190.703,455.701)
NetArduinoDue_12: "FC 31.4" ArduinoDue.12 | length 140
  Top Layer w0.3: ArduinoDue.12@166.497,392.176 166.497,436.448 v1(166.599,436.55) ; v1(192.227,457.149) 192.227,459.715 207.137,474.624 207.137,497.459
  Bottom Layer w0.3: v1(166.599,436.55) 166.599,441.198 167.545,442.144 185.49,442.144 186.715,440.919 186.715,440.055 187.488,439.282 188.595,439.282 189.255,439.942 189.255,455.93 190.475,457.149 v1(192.227,457.149)
NetArduinoDue_14: "FC 30.5" ArduinoDue.14 | length 138.1
  Top Layer w0.3: 112.141,446.786 115.603,450.248 124.871,450.248 132.486,442.633 v1(132.486,405.994)
  Bottom Layer w0.3: v1(132.486,405.994) 149.682,405.994 153.874,401.802 193.701,401.802 ArduinoDue.14@203.327,392.176
NetArduinoDue_15: "FC 30.4" ArduinoDue.15 | length 149
  Top Layer w0.3: v1(109.423,427.609) 109.423,441.528 114.681,446.786 ; v1(203.327,418.795) 203.327,394.716 ArduinoDue.15@205.867,392.176
  Bottom Layer w0.3: v1(109.423,427.609) 128.524,427.609 130.175,425.958 176.352,425.958 186.461,415.849 200.381,415.849 v1(203.327,418.795)
NetArduinoDue_16: "FC 31.8" ArduinoDue.16 | length 112.2
  Top Layer w0.3: v1(205.283,435.28) 205.283,394.183 206.096,393.37 207.213,393.37 ArduinoDue.16@208.407,392.176
  Bottom Layer w0.3: v1(205.283,435.28) 205.715,435.712 205.715,485.877 217.297,497.459
NetArduinoDue_17: "FC 31.9" ArduinoDue.17 | length 113
  Top Layer w0.3: v1(208.813,438.506) 207.924,437.617 207.924,395.199 ArduinoDue.17@210.947,392.176
  Bottom Layer w0.3: v1(208.813,438.506) 208.432,438.506 207.253,439.685 207.253,440.984 208.229,441.96 208.229,451.155 216.992,459.918 216.992,490.449 219.837,493.293 219.837,497.459
NetArduinoDue_18: "FCT 2.4" ArduinoDue.18 FC26.9 | length 133.3
  Top Layer w0.3: v1(211.48,407.568) 211.48,394.183 ArduinoDue.18@213.487,392.176
  Bottom Layer w0.3: 100.076,421.259 102.616,418.719 FC26.9@127.635,418.719 160.833,418.719 171.983,407.568 v1(211.48,407.568)
NetArduinoDue_19: "FC 27.9" "FCT 3.4" ArduinoDue.19 | length 79.6
  Top Layer w0.3: ArduinoDue.19@216.027,392.176 v1(216.027,416.143)
  Bottom Layer w0.3: v1(216.027,416.143) 227.964,416.143 228.127,416.306 240.792,416.306 240.919,416.179 250.747,416.179 251.689,417.121 257.932,417.121 258.762,417.95 264.661,417.95 268.986,422.275
NetArduinoDue_20: "FC 31.12" ArduinoDue.20 | length 127.9
  Top Layer w0.3: v1(212.852,438.683) 212.217,439.318 212.217,441.096 212.725,441.604 216.586,441.604 217.195,440.995 217.195,393.548 ArduinoDue.20@218.567,392.176
  Bottom Layer w0.3: v1(212.852,438.683) 212.217,439.318 212.217,452.526 217.805,458.114 217.805,489.457 221.209,492.86 221.209,498.221 221.615,498.627 226.289,498.627 227.457,497.459
NetArduinoDue_21: "FC 31.13" ArduinoDue.21 | length 135.5
  Top Layer w0.3: v1(211.531,437.007) 212.954,435.585 212.954,394.564 214.859,392.659 214.859,391.109 215.265,390.703 219.634,390.703 ArduinoDue.21@221.107,392.176 ; v1(218.491,494.436) 221.107,497.053 221.107,497.84 222.936,499.669 227.787,499.669 229.997,497.459
  Bottom Layer w0.3: v1(211.531,437.007) 208.382,437.007 206.699,438.69 206.699,442.144 207.239,442.684 207.239,462.382 216.179,471.322 216.179,492.125 v1(218.491,494.436)
NetArduinoDue_22: ArduinoDue.22 FC1.4 | length 169
  Top Layer w0.3: ArduinoDue.22@228.727,394.716 229.692,394.716 230.124,395.148 230.124,395.503 230.505,395.884 232.41,395.884 232.994,396.469 232.994,432.765 231.572,434.188 230.099,434.188 230.099,436.982 v1(229.184,437.896) ; v1(231.445,487.629) 233.147,489.331 233.147,496.976 v1(234.175,498.005)
  Bottom Layer w0.3: FC1.4@188.087,502.666 194.158,502.666 196.088,500.736 231.445,500.736 v1(234.175,498.005) ; v1(229.184,437.896) 228.816,437.528 223.763,437.528 222.479,438.812 222.479,451.46 232.08,461.061 232.08,486.994 v1(231.445,487.629)
NetArduinoDue_23: ArduinoDue.23 FC2.4 | length 186.9
  Top Layer w0.3: ArduinoDue.23@231.267,394.716 232.41,394.716 233.731,396.037 v1(233.731,438.302)
  Bottom Layer w0.3: v1(233.731,438.302) 233.731,445.171 239.116,450.556 239.116,453.39 240.386,454.66 242.57,454.66 244.743,456.833 261.976,456.833 263.866,458.724 266.065,458.724 267.081,459.74 267.081,461.493 267.462,461.874 267.462,462.291 267.97,462.799 269.61,462.799 272.034,460.375 275.806,460.375 277.379,461.948 277.379,469.991 276.174,471.195 276.174,482.295 247.269,511.2 247.269,521.886 FC2.4@242.479,526.677
NetArduinoDue_24: ArduinoDue.24 FC3.4 | length 136.9
  Top Layer w0.3: v1(255.219,405.46) 256.331,406.572 256.331,421.735 261.897,427.302 261.897,428.25 263.258,429.611 263.258,432.422 263.119,432.561 263.119,463.299 264.019,464.199 264.019,467.726 275.272,478.98 275.272,479.919 266.675,488.517 v1(266.675,497.616)
  Bottom Layer w0.3: ArduinoDue.24@228.727,397.256 230.099,398.628 233.045,398.628 236.728,402.311 245.038,402.311 247.913,405.186 254.945,405.186 v1(255.219,405.46) ; FC3.4@264.668,499.623 v1(266.675,497.616)
NetArduinoDue_25: ArduinoDue.25 FC4.4 | length 93.6
  Bottom Layer w0.3: ArduinoDue.25@231.267,397.256 233.274,397.256 235.687,399.669 243.256,399.669 248.082,404.495 253.39,404.495 253.644,404.241 269.261,404.241 275.361,410.342 275.361,453.492 FC4.4@274.828,454.025
NetArduinoDue_26: ArduinoDue.26 FC5.4 | length 36.1
  Bottom Layer w0.3: ArduinoDue.26@228.727,399.796 229.895,400.964 232.537,400.964 234.544,402.971 236.855,402.971 238.608,404.724 244.928,404.724 246.772,406.568 251.933,406.568 254.818,409.453 FC5.4@260.858,409.453
NetArduinoDue_27: ArduinoDue.27 FC6.4 | length 34.8
  Top Layer w0.3: ArduinoDue.27@231.267,399.796 229.997,398.526 229.997,396.596 229.503,396.102 227.965,396.102 227.559,395.696 227.559,391.668 228.651,390.576 v1(234.01,390.576)
  Bottom Layer w0.3: FC6.4@226.446,377.825 225.908,378.363 225.908,384.2 232.283,390.576 v1(234.01,390.576)
NetArduinoDue_28: ArduinoDue.28 FC7.4 | length 163.9
  Top Layer w0.3: v1(153.975,369.722) 152.908,370.789 152.908,387.35 153.543,387.985 217.576,387.985 218.186,387.375 221.285,387.375 v1(221.31,387.401)
  Bottom Layer w0.3: v1(153.975,369.722) 178.664,369.722 FC7.4@180.848,367.538 ; v1(221.31,387.401) 221.31,388.671 219.837,390.144 219.837,392.709 219.075,393.471 205.74,393.471 205.283,393.929 205.283,395.935 207.67,398.323 224.714,398.323 ArduinoDue.28@228.727,402.336
NetArduinoDue_29: ArduinoDue.29 FC8.4 | length 119.1
  Top Layer w0.3: v1(222.631,393.598) 227.559,398.526 229.108,398.526 229.881,399.299 229.881,400.95 ArduinoDue.29@231.267,402.336
  Bottom Layer w0.3: FC8.4@136.276,381.635 136.276,386.842 136.338,386.904 137.432,386.904 138.049,387.521 142.162,387.521 144.124,389.484 150.317,389.484 151.892,391.058 151.892,392.43 152.806,393.344 154.305,393.344 154.965,392.684 154.965,391.16 156.591,389.534 216.295,389.534 219.594,386.236 221.985,386.236 222.631,386.882 v1(222.631,393.598)
NetArduinoDue_30: ArduinoDue.30 FC9.4 | length 132
  Bottom Layer w0.3: FC9.4@104.648,416.047 104.648,410.489 107.747,407.391 149.352,407.391 150.216,406.527 210.276,406.527 211.288,405.515 228.088,405.515 ArduinoDue.30@228.727,404.876
NetArduinoDue_31: ArduinoDue.31 FC10.4 | length 217.1
  Top Layer w0.3: v1(188.087,444.348) 189.006,445.267 210.586,445.267 211.505,444.348 229.228,444.348 230.534,445.654 236.537,445.654 237.043,445.148 237.043,441.909 236.15,441.016 236.15,425.685 237.236,424.599 237.236,407.289 v1(236.779,406.832)
  Bottom Layer w0.3: FC10.4@94.488,461.645 88.875,456.032 88.875,445.77 89.408,445.237 90.881,445.237 91.415,445.77 91.415,447.573 106.655,447.573 109.88,444.348 v1(188.087,444.348) ; ArduinoDue.31@231.267,404.876 233.223,406.832 v1(236.779,406.832)
NetArduinoDue_32: ArduinoDue.32 FC11.4 | length 235.9
  Top Layer w0.3: v1(98.455,503.123) 93.116,497.785 93.116,478.206 106.921,464.401 106.921,460.058 105.181,458.318 105.181,452.59 105.721,452.05 105.721,425.837 103.886,424.002 v1(103.886,419.938)
  Bottom Layer w0.3: v1(98.455,503.123) 106.401,503.123 106.553,502.971 107.823,502.971 108.458,503.606 FC11.4@108.458,506.344 ; v1(103.886,419.938) 172.39,419.938 178.992,413.336 222.807,413.336 ArduinoDue.32@228.727,407.416
NetArduinoDue_33: ArduinoDue.33 FC12.4 | length 283.1
  Top Layer w0.3: v1(221.005,427.634) 221.005,414.858 227.076,408.788 229.895,408.788 ArduinoDue.33@231.267,407.416
  Bottom Layer w0.3: FC12.4@132.116,531.36 125.722,531.36 99.746,505.384 93.345,505.384 91.419,503.458 91.419,467.999 88.316,464.896 88.316,440.258 98.323,430.251 138.659,430.251 140.665,428.244 152.298,428.244 155.067,431.013 217.627,431.013 v1(221.005,427.634)
NetArduinoDue_34: ArduinoDue.34 J9.1 | length 110
  Top Layer w0.3: v1(219.989,445.643) 220.574,446.227 239.598,446.227 240.182,446.811 240.182,469.457 244.867,474.142 253.314,474.142 J9.1@260.477,466.979 ; v1(221.132,435.254) 222.58,433.807 222.58,416.103 ArduinoDue.34@228.727,409.956
  Bottom Layer w0.3: v1(219.989,445.643) 217.399,443.052 217.399,438.988 v1(221.132,435.254)
NetArduinoDue_35: ArduinoDue.35 J1.1 | length 87.8
  Top Layer w0.3: v1(236.068,409.6) 235.61,409.143 235.61,405.765 235.941,405.435 237.603,405.435 237.933,405.765 237.933,425.138 236.823,426.247 236.823,440.507 237.597,441.28 237.597,443.159 243.77,449.332 243.77,467.468 245.11,468.808 252.044,468.808 J1.1@253.746,467.106
  Bottom Layer w0.3: ArduinoDue.35@231.267,409.956 235.712,409.956 v1(236.068,409.6)
NetArduinoDue_36: ArduinoDue.36 J10.1 | length 101.5
  Top Layer w0.3: v1(209.093,417.754) 209.093,436.956 210.82,438.683 v1(210.845,438.683) ; v1(209.575,443.941) 209.728,443.789 231.267,443.789 v1(231.699,444.221) ; v1(226.974,417.297) 226.974,414.249 ArduinoDue.36@228.727,412.496
  Bottom Layer w0.3: v1(209.093,417.754) 209.245,417.601 226.67,417.601 v1(226.974,417.297) ; v1(209.575,443.941) 209.575,439.953 v1(210.845,438.683) ; v1(231.699,444.221) 231.699,450.393 243.611,462.305 243.611,465.144 243.036,465.72 243.036,466.259 J10.1@242.443,466.852
NetArduinoDue_37: ArduinoDue.37 J2.1 | length 91.7
  Top Layer w0.3: v1(245.542,409.118) 246.736,410.312 246.736,413.385 247.686,414.336 247.686,415.533 247.117,416.103 247.117,426.72 245.966,427.871 245.966,431.757 245.77,431.952 245.77,439.826 245.415,440.182 245.415,465.074 246.126,465.785 254.914,465.785 254.914,469.748 J2.1@251.714,472.948
  Bottom Layer w0.3: ArduinoDue.37@231.267,412.496 233.531,412.496 234.467,411.56 237.893,411.56 239.522,409.931 244.729,409.931 v1(245.542,409.118)
NetArduinoDue_38: ArduinoDue.38 J11.1 | length 60.9
  Top Layer w0.3: v1(251.619,410.267) 253.986,412.634 253.986,427.925 254.66,428.6 261.442,428.6 262.103,429.26 v1(262.103,431.394)
  Bottom Layer w0.3: ArduinoDue.38@228.727,415.036 229.884,413.879 237.552,413.879 238.633,414.96 244.175,414.96 245.928,413.207 246.735,413.207 249.676,410.267 v1(251.619,410.267) ; v1(262.103,431.394) 264.516,431.394 J11.1@266.827,433.705
NetArduinoDue_39: ArduinoDue.39 J3.1 | length 79.4
  Top Layer w0.3: v1(236.068,412.725) v1(236.068,415.036) ; v1(245.567,412.039) 245.567,413.969 v1(246.532,414.934) ; v1(261.341,416.789) 265.074,420.522 265.074,426.493 268.535,429.954 268.535,446.399 v1(267.945,446.989)
  Bottom Layer w0.3: ArduinoDue.39@231.267,415.036 v1(236.068,415.036) ; v1(236.068,412.725) 236.423,412.369 245.237,412.369 v1(245.567,412.039) ; v1(246.532,414.934) 249.682,411.785 260.35,411.785 261.645,412.75 262.077,413.182 262.077,416.052 v1(261.341,416.789) ; J3.1@264.414,444.5 266.903,446.989 v1(267.945,446.989)
NetArduinoDue_40: ArduinoDue.40 J12.1 | length 41.4
  Top Layer w0.3: v1(224.968,435.254) 223.698,433.984 223.698,422.605 ArduinoDue.40@228.727,417.576 ; v1(239.166,439.572) 239.166,440.08 J12.1@241.808,442.722
  Bottom Layer w0.3: v1(224.968,435.254) 226.035,434.188 233.782,434.188 v1(239.166,439.572)
NetArduinoDue_41: ArduinoDue.41 J4.1 | length 25.7
  Bottom Layer w0.3: ArduinoDue.41@231.267,417.576 240.741,417.576 240.92,417.397 250.908,417.397 251.516,418.005 253.365,418.005 254.402,419.042 254.402,419.756 J4.1@255.143,420.497
NetArduinoDue_42: ArduinoDue.42 J1.3 | length 68.8
  Top Layer w0.3: v1(224.917,438.683) 226.122,437.479 226.122,429.931 224.257,428.066 224.257,423.545 227.686,420.116 ArduinoDue.42@228.727,420.116 ; v1(242.265,469.163) 244.17,471.068 v1(244.475,471.068)
  Bottom Layer w0.3: v1(224.917,438.683) 224.917,446.202 235.28,456.565 235.28,462.178 v1(242.265,469.163) ; v1(244.475,471.068) 244.704,471.068 J1.3@248.666,467.106
NetArduinoDue_43: ArduinoDue.43 J2.3 | length 65.1
  Top Layer w0.3: v1(228.041,440.157) 227.559,439.674 227.559,426.898 227.965,426.491 229.235,426.491 229.895,425.831 229.895,421.488 ArduinoDue.43@231.267,420.116 ; v1(242.443,462.887) 241.289,464.041 241.289,468.006 243.205,468.006 246.634,471.435 J2.3@246.634,472.948
  Bottom Layer w0.3: v1(228.041,440.157) 228.041,448.486 v1(242.443,462.887)
NetArduinoDue_44: ArduinoDue.44 J3.3 | length 49.1
  Top Layer w0.3: v1(243.434,427.812) 242.965,428.28 242.965,437.123 v1(244.348,438.506)
  Bottom Layer w0.3: ArduinoDue.44@228.727,422.656 229.337,423.113 230.099,423.875 237.566,423.875 238.76,425.069 241.325,425.069 243.434,427.177 v1(243.434,427.812) ; v1(244.348,438.506) 245.262,439.42 J3.3@264.414,439.42
NetArduinoDue_45: ArduinoDue.45 J4.3 | length 21.3
  Bottom Layer w0.3: ArduinoDue.45@231.267,422.656 235.664,422.656 238.252,420.068 241.3,420.068 242.863,418.505 243.903,418.505 245.895,420.497 J4.3@250.063,420.497
NetArduinoDue_46: "FCT 1.1" ArduinoDue.46 FC21.1 | length 312.6
  Top Layer w0.3: v1(108.229,432.791) 108.229,448.094 123.368,463.233 v1(123.368,467.182) ; v1(124.968,432.791) 125.452,432.307 125.452,392.733 128.372,389.814 131.394,389.814 132.766,388.442 140.843,388.442 149.581,379.705 149.581,365.76 150.241,365.1 162.281,365.1 163.449,366.268
  Bottom Layer w0.3: v1(108.229,432.791) v1(124.968,432.791) 202.891,432.791 203.248,432.434 221.214,432.434 227.711,425.937 227.986,425.937 ArduinoDue.46@228.727,425.196 ; v1(123.368,467.182) 126.035,467.182 137.744,478.892 157.455,478.892 FC21.1@165.227,486.664
NetArduinoDue_47: "FCT 1.2" ArduinoDue.47 FC22.1 | length 222.5
  Top Layer w0.3: v1(175.59,365.557) 175.59,370.815 179.451,374.675 214.63,374.675 215.519,375.564 215.519,379.857 223.571,387.909 236.728,387.909 239.166,390.347 239.166,427.431 v1(238.531,428.066) ; v1(263.703,426.542) 267.981,430.82 267.981,445.175 266.776,446.38 266.776,449.58 269.773,452.577 269.773,454.977 269.354,455.397 267.97,455.397 267.451,455.916 267.451,459.74 268.086,460.375 269.494,460.375 271.145,462.026 FC22.1@271.145,469.392
  Bottom Layer w0.3: 160.909,366.268 162.063,367.422 173.725,367.422 v1(175.59,365.557) ; ArduinoDue.47@231.267,425.196 235.661,425.196 v1(238.531,428.066) 238.531,427.507 241.859,427.507 242.164,427.812 242.164,428.625 242.505,428.966 244.261,428.966 248.045,425.182 253.173,425.182 256.108,428.117 262.128,428.117 v1(263.703,426.542)